# Altium PCB Buck001.PcbDoc
Units mm, origin at the board's own origin, x right, y up, seen from the top; angles counter-clockwise.
Board outline 35 x 25 mm, 2 copper layers (Top Layer, Bottom Layer), stack 1.57 mm thick; 68 components, 12 nets, 95 pads, 277 vias.
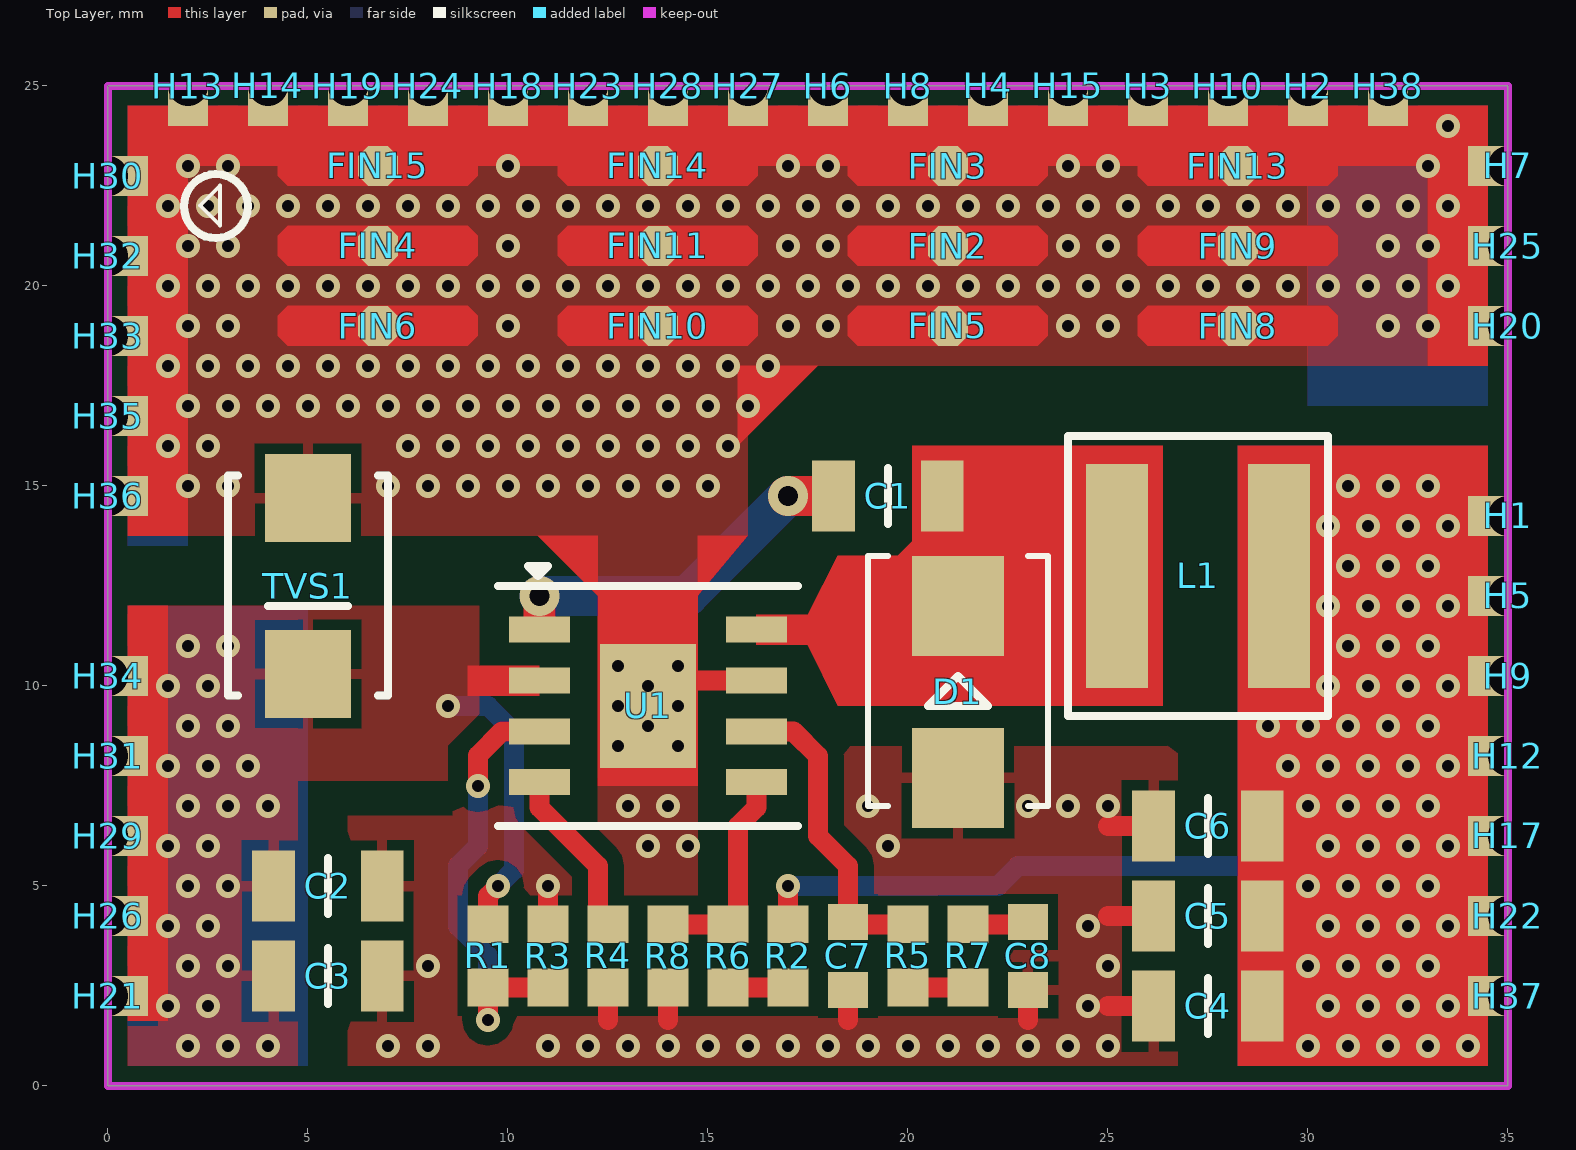
[diagram p0: Top Layer view]
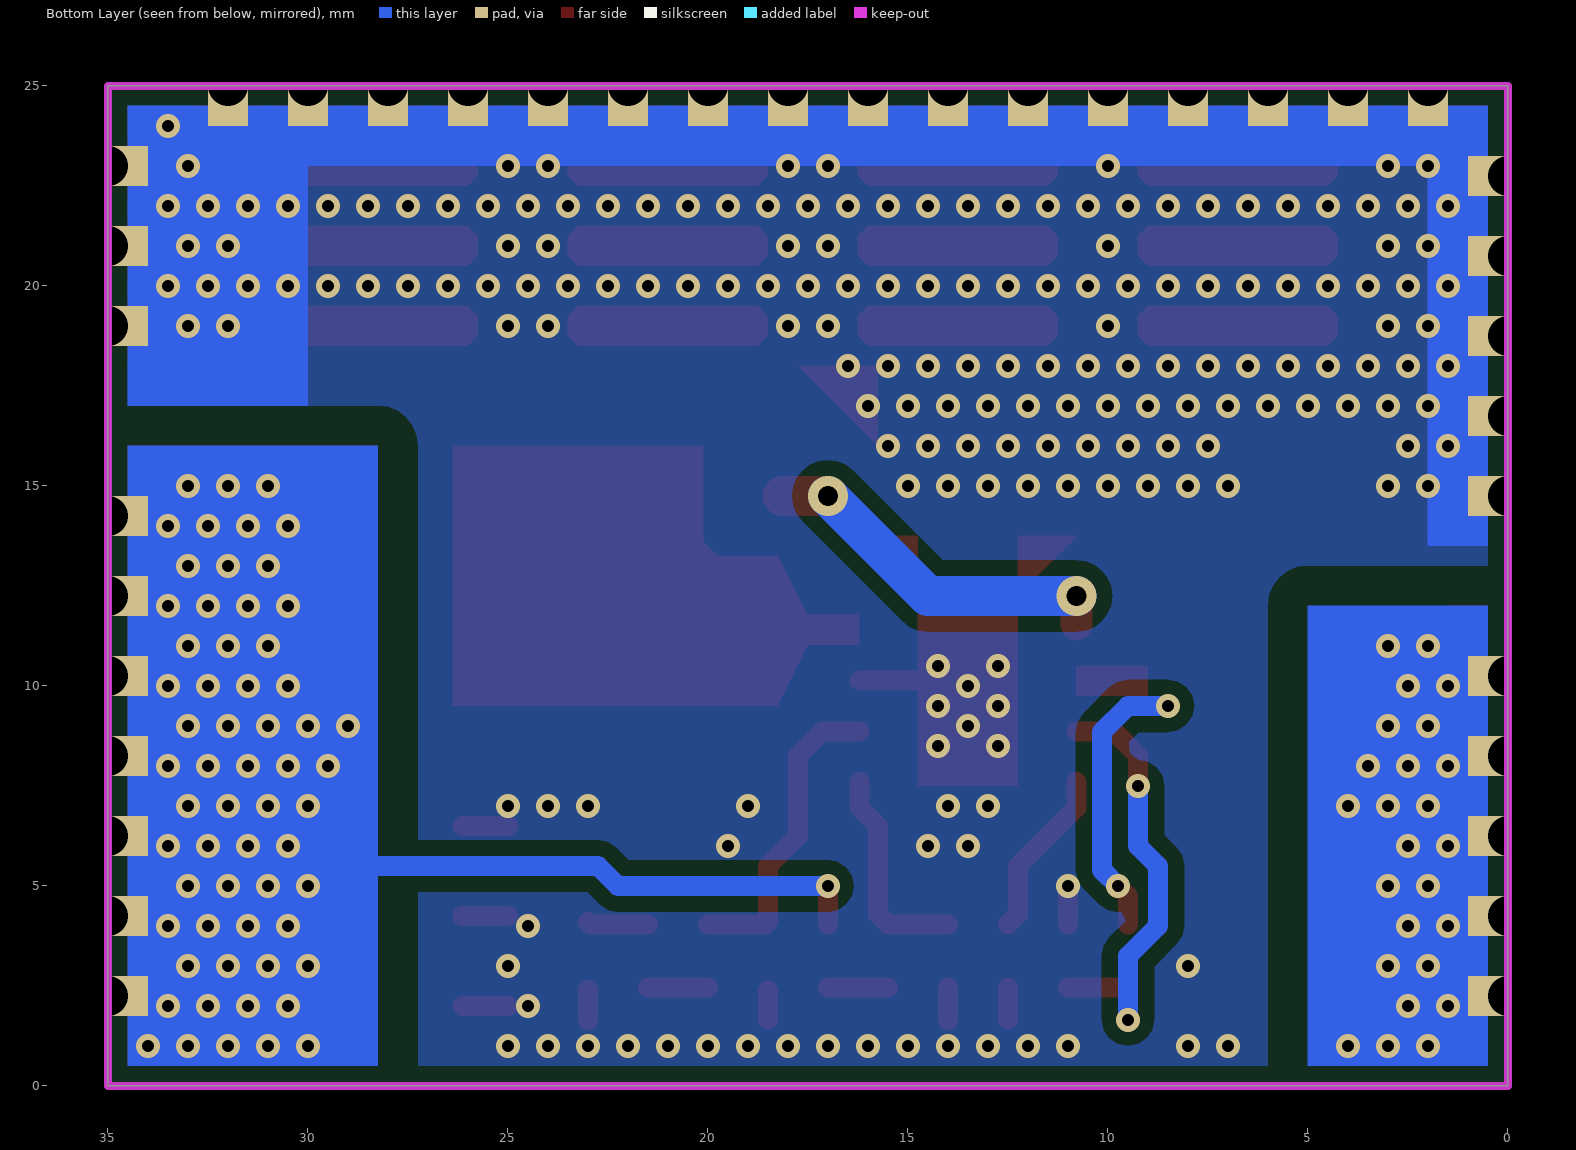
[diagram p1: Bottom Layer view, seen from below]

## Layer stack, top to bottom
Top Solder: solder mask 0.01, Solder Resist, Dk 3.5
Top Layer: signal copper 0.035
Dielectric 1: dielectric 1.5, FR-4, Dk 4.8
Bottom Layer: signal copper 0.035
Bottom Solder: solder mask 0.01, Solder Resist, Dk 3.5

## Board outline
0,0 35,0 35,25 0,25

## Design rules (kind name [scope] priority, off if disabled: settings)
Clearance [All] p1: gap=0.254 ignorepadtopadclearanceinfootprint=TRUE except(0.39: Track-Poly; 0.7: Poly-Poly; 1: Poly-Region)
PolygonConnect [All] p1: connectstyle=Relief reliefconductorwidth=0.254 reliefentries=4 polygonreliefangle="90 Angle" airgapwidth=0.254
RoutingVias [All] p1: holewidth=0.711 width=1.27 viastyle="Through Hole" minholewidth=0.711 minwidth=1.27 maxholewidth=0.711 maxwidth=1.27
SolderMaskExpansion [All] p1: expansion=0.102 istentingtop=FALSE
SupplyNets "Schematic Supply Nets_3" [InNet('VOUT')] p1: voltage=0.000
SupplyNets "Schematic Supply Nets_1" [InNet('GND')] p2: voltage=0.000
SupplyNets "Schematic Supply Nets" [InNet('VIN')] p3: voltage=0.000
Width [All] p1: maxlimit=5 minlimit=0.254 preferedwidth=0.254
30 further rules are at their usual default settings.

## Components (designator, comment, footprint, x,y, rotation, side; value= is the part's Value field where it differs from the comment)
C1 "MLCC_1206" CAP1206 19.5,14.75 r0 top value=100nF
C2 "MLCC_1206" CAP1206 5.5,5 r0 top value=4.7uF
C3 "MLCC_1206" CAP1206 5.5,2.75 r0 top value=4.7uF
C4 "MLCC_1206" CAP1206 27.5,2 r180 top value=47uF
C5 "MLCC_1206" CAP1206 27.5,4.25 r180 top value=47uF
C6 "MLCC_1206" CAP1206 27.5,6.5 r180 top value=47uF
C7 "ERP_102-1" CAPC1608X10N 18.5,3.25 r270 top value=15pF
C8 "ERP_102-1" CAPC1608X10N 23,3.25 r270 top value=0.015uF
D1 "CDBB_5XX_HF" SMB(DO214AA) 21.25,12 r270 top
FIN2 "FIN_5X1" FIN_5X1 21,21 r180 top
FIN3 "FIN_5X1" FIN_5X1 21,23 r180 top
FIN4 "FIN_5X1" FIN_5X1 6.75,21 r180 top
FIN5 "FIN_5X1" FIN_5X1 21,19 r180 top
FIN6 "FIN_5X1" FIN_5X1 6.75,19 r180 top
FIN8 "FIN_5X1" FIN_5X1 28.25,19 r180 top
FIN9 "FIN_5X1" FIN_5X1 28.25,21 r180 top
FIN10 "FIN_5X1" FIN_5X1 13.75,19 r180 top
FIN11 "FIN_5X1" FIN_5X1 13.75,21 r180 top
FIN13 "FIN_5X1" FIN_5X1 28.25,23 r180 top
FIN14 "FIN_5X1" FIN_5X1 13.75,23 r180 top
FIN15 "FIN_5X1" FIN_5X1 6.75,23 r180 top
H1 "Castalated_Hole_1MM" CS_1MM 35,14.25 r90 top
H2 "Castalated_Hole_1MM" CS_1MM 30,25 r180 top
H3 "Castalated_Hole_1MM" CS_1MM 26,25 r180 top
H4 "Castalated_Hole_1MM" CS_1MM 22,25 r180 top
H5 "Castalated_Hole_1MM" CS_1MM 35,12.25 r90 top
H6 "Castalated_Hole_1MM" CS_1MM 18,25 r180 top
H7 "Castalated_Hole_1MM" CS_1MM 35,23 r90 top
H8 "Castalated_Hole_1MM" CS_1MM 20,25 r180 top
H9 "Castalated_Hole_1MM" CS_1MM 35,10.25 r90 top
H10 "Castalated_Hole_1MM" CS_1MM 28,25 r180 top
H12 "Castalated_Hole_1MM" CS_1MM 35,8.25 r90 top
H13 "Castalated_Hole_1MM" CS_1MM 2,25 r180 top
H14 "Castalated_Hole_1MM" CS_1MM 4,25 r180 top
H15 "Castalated_Hole_1MM" CS_1MM 24,25 r180 top
H17 "Castalated_Hole_1MM" CS_1MM 35,6.25 r90 top
H18 "Castalated_Hole_1MM" CS_1MM 10,25 r180 top
H19 "Castalated_Hole_1MM" CS_1MM 6,25 r180 top
H20 "Castalated_Hole_1MM" CS_1MM 35,19 r90 top
H21 "Castalated_Hole_1MM" CS_1MM 0,2.25 r270 top
H22 "Castalated_Hole_1MM" CS_1MM 35,4.25 r90 top
H23 "Castalated_Hole_1MM" CS_1MM 12,25 r180 top
H24 "Castalated_Hole_1MM" CS_1MM 8,25 r180 top
H25 "Castalated_Hole_1MM" CS_1MM 35,21 r90 top
H26 "Castalated_Hole_1MM" CS_1MM 0,4.25 r270 top
H27 "Castalated_Hole_1MM" CS_1MM 16,25 r180 top
H28 "Castalated_Hole_1MM" CS_1MM 14,25 r180 top
H29 "Castalated_Hole_1MM" CS_1MM 0,6.25 r270 top
H30 "Castalated_Hole_1MM" CS_1MM 0,22.75 r270 top
H31 "Castalated_Hole_1MM" CS_1MM 0,8.25 r270 top
H32 "Castalated_Hole_1MM" CS_1MM 0,20.75 r270 top
H33 "Castalated_Hole_1MM" CS_1MM 0,18.75 r270 top
H34 "Castalated_Hole_1MM" CS_1MM 0,10.25 r270 top
H35 "Castalated_Hole_1MM" CS_1MM 0,16.75 r270 top
H36 "Castalated_Hole_1MM" CS_1MM 0,14.75 r270 top
H37 "Castalated_Hole_1MM" CS_1MM 35,2.25 r90 top
H38 "Castalated_Hole_1MM" CS_1MM 32,25 r180 top
L1 "SRP6060FA" SRP6060FA 27.25,12.75 r0 top value=22uH
R1 "ERP_101-1" RES_0603 9.5,3.25 r90 top value=470k
R2 "ERP_101-1" RES_0603 17,3.25 r90 top value=110k
R3 "ERP_101-1" RES_0603 11,3.25 r270 top value=39k
R4 "ERP_101-1" RES_0603 12.5,3.25 r90 top value=120k
R5 "ERP_101-1" RES_0603 20,3.25 r90 top value=24k
R6 "ERP_101-1" RES_0603 15.5,3.25 r270 top value=30k
R7 "ERP_101-1" RES_0603 21.5,3.25 r270 top value=2k4
R8 "ERP_101-1" RES_0603 14,3.25 r90 top value=10k
TVS1 "SMBJ58A" SMBJ58A 5,12.5 r90 top
U1 "TPS54360DDAR" TPS54360DDAR 13.5,9.5 r0 top locked

## Footprints (in the part's own frame and the unit in brackets; to place one, negate y for a bottom-side part, rotate by r counter-clockwise, add the part's x,y. Pads: shape width x height; smd on the part's side, far side on the other; paste and mask are expansions set on the pad)
CAP1206 [mm] "MLCC 1206 (3216 Metric)"
  rect 1.07x1.78 smd: 1(-1.36,0) 2(1.36,0)
  silkscreen extent 0,-0.7 0,0.7, body extent -1.6,-0.8 1.6,0.8, height 1.8
CAPC1608X10N [mm] "Chip Capacitor, 2-Leads, Body 1.60x0.80mm, IPC Medium Density"
  rect 0.9x1 smd: 1(-0.85,0) 2(0.85,0)
  body extent -0.9,-0.5 0.9,0.5, height 1
CS_1MM [mm]
  rect 1x1 hole 1 copper offset 0,0.5 mask+0.01: 1(0,0)
FIN_5X1 [mm]
  oct 1x1 smd: 1(0,0)
  Top Layer region: -2.25,-0.5 -2.5,-0.25 -2.5,0.25 -2.25,0.5 2.25,0.5 2.5,0.25 2.5,-0.25 2.25,-0.5
  body extent -2.5,-0.5 2.5,0.5, height 0.25
RES_0603 [mm]
  rect 0.94x1.02 smd: 1(-0.79,0) 2(0.79,0)
  body extent -0.8,-0.4 0.8,0.4, height 0.45
SMB(DO214AA) [mm]
  rect 2.5x2.3 smd paste+0 mask+0: 1(0,0) 2(4.3,0)
  silkscreen extent -1.25,-2.25 5,2.25, body extent -0.86,-1.99 4.72,1.99, height 3.25
SMBJ58A [mm] "TVS DIODE DO-214AA, SMB"
  rect 2.2x2.15 smd: 1(-2.2,0) 2(2.2,0)
  silkscreen extent -2.74,-2 2.76,2, body extent -2.7,-1.81 2.7,1.81, height 2.44
SRP6060FA [mm]
  rect 1.55x5.6 smd: 1(-2.025,0) 2(2.025,0)
  silkscreen extent -3.25,-3.5 3.25,3.5, body extent -3.2,-3.3 3.2,3.3, height 5.86
TPS54360DDAR [mm]
  rect 1.525x0.65 smd: 1(-2.712,1.905) 2(-2.712,0.635) 3(-2.712,-0.635) 4(-2.712,-1.905) 5(2.712,-1.905) 6(2.712,-0.635) 7(2.712,0.635) 8(2.712,1.905)
  rect 2.4x3.1 smd: 9(0,0)
  silkscreen extent -3.75,-3 3.75,3.5, body extent -3,-2.45 3,2.45, height 1.7

## Part data
C1: "MLCC 1206 (3216 Metric)", Package=1206, Voltage=25V
C2 C3: "MLCC 1206 (3216 Metric)", Manufacturer 1="Murata Electronics", Manufacturer Part Number 1=GRM31CZ72A475KE11L, Package=1206, Voltage=100V
C4 C5 C6: "MLCC 1206 (3216 Metric)", Manufacturer 1="Murata Electronics", Manufacturer Part Number 1=GRM31CZ72A475KE11L, Package=1206, Voltage=25V
C7 C8: library part MLCC_0603, "Chip Capacitor, 2-Leads, Body 1.60x0.80mm, IPC Medium Density", Package=0603
D1: "SMB(DO-214AA) DIODE HF 5A", Manufacturer 1=Comchip, Manufacturer Part Number 1=CDBB5100-HF, Package=SMB
FIN2 FIN3 FIN4 FIN5 FIN6 FIN8 FIN9 FIN10 FIN11 FIN13 FIN14 FIN15: "FIN_5X1 Radiator"
L1: "SRP6060FA Bourns 6.4 x 6.6 MM", Manufacturer 1=Coilcraft, Manufacturer Part Number 1=SRP6060FA-220M, DCR=55mOhm, ISAT=5.6A
R1 R2 R3 R4 R5 R6 R7 R8: library part RES_0603, "RES_0603", Package=0603
TVS1: "TVS DIODE DO-214AA, SMB", Manufacturer Part Number 1=SMBJ64A, PD=600W, VBR=77.1V, VCL=103V, VRV=64V
U1: "Buck, Split Rail Switching Regulator IC Positive Adjustable 0.8V 1 Output 3.5A 8-PowerSOIC (0.154\", 3.90mm Width)", Manufacturer 1="Texas Instruments", Manufacturer Part Number 1=TPS54360DDAR

## Via types
v1: diameter 0.6, hole 0.3, Top Layer to Bottom Layer, tented both sides, 275 vias
v2: diameter 1, hole 0.5, Top Layer to Bottom Layer, tented both sides, 2 vias

## Nets (pads, with @x,y where several pads share a name; then routed paths per layer and width w, separated by ;. In a path a pad name is that pad's centre, name@x,y a point inside that pad or via, vN(x,y) a via of type N, cw(c..) or ccw(c..) an arc to the next point about the centre after c; other vN are vias at no path point)
FB: R6.1 R8.2 U1.5 | length 5.3
  Top Layer w0.5: R8.2 R6.1 15.75,4.29 15.75,6.5 16.212,6.962 U1.5
GND: C2.2 C3.2 C4.2 C5.2 C6.2 C7.2 C8.2 D1.2 FIN2.1 FIN3.1 FIN4.1 FIN5.1 FIN6.1 FIN8.1 FIN9.1 FIN10.1 FIN11.1 FIN13.1 FIN14.1 FIN15.1 H2.1 H3.1 H4.1 H6.1 H7.1 H8.1 H10.1 H13.1 H14.1 H15.1 H18.1 H19.1 H20.1 H23.1 H24.1 H25.1 H27.1 H28.1 H30.1 H32.1 H33.1 H35.1 H36.1 H38.1 R3.1 R4.1 R8.1 TVS1.2 U1.7 U1.9 | length 10.5
  Top Layer w0.5: R3.1 v1(11,5) ; 12.5,1.654 R4.1 ; U1.9 14.135,10.135 U1.7 ; 14,1.654 R8.1 ; 18.5,1.654 C7.2 ; 23,1.654 C8.2 ; 25,2 C4.2 ; 25,4.25 C5.2 ; 25,6.5 C6.2
  other v1: 7,1 8,1 11,1 12,1 13,1 14,1 15,1 16,1 17,1 18,1 19,1 20,1 21,1 22,1 23,1 24,1 25,1 24.5,2 8,3 25,3 24.5,4 13.5,6 14.5,6 19.5,6 13,7 14,7 19,7 23,7 24,7 25,7 12.75,8.5 14.25,8.5 13.5,9 12.75,9.5 14.25,9.5 13.5,10 12.75,10.5 14.25,10.5 2,15 3,15 7,15 8,15 9,15 10,15 11,15 12,15 13,15 14,15 15,15 1.5,16 2.5,16 7.5,16 8.5,16 9.5,16 10.5,16 11.5,16 12.5,16 13.5,16 14.5,16 15.5,16 2,17 3,17 4,17 5,17 6,17 7,17 8,17 9,17 10,17 11,17 12,17 13,17 14,17 15,17 16,17 1.5,18 2.5,18 3.5,18 4.5,18 5.5,18 6.5,18 7.5,18 8.5,18 9.5,18 10.5,18 11.5,18 12.5,18 13.5,18 14.5,18 15.5,18 16.5,18 2,19 3,19 10,19 17,19 18,19 24,19 25,19 32,19 33,19 1.5,20 2.5,20 3.5,20 4.5,20 5.5,20 6.5,20 7.5,20 8.5,20 9.5,20 10.5,20 11.5,20 12.5,20 13.5,20 14.5,20 15.5,20 16.5,20 17.5,20 18.5,20 19.5,20 20.5,20 21.5,20 22.5,20 23.5,20 24.5,20 25.5,20 26.5,20 27.5,20 28.5,20 29.5,20 30.5,20 31.5,20 32.5,20 33.5,20 2,21 3,21 10,21 17,21 18,21 24,21 25,21 32,21 33,21 1.5,22 2.5,22 3.5,22 4.5,22 5.5,22 6.5,22 7.5,22 8.5,22 9.5,22 10.5,22 11.5,22 12.5,22 13.5,22 14.5,22 15.5,22 16.5,22 17.5,22 18.5,22 19.5,22 20.5,22 21.5,22 22.5,22 23.5,22 24.5,22 25.5,22 26.5,22 27.5,22 28.5,22 29.5,22 30.5,22 31.5,22 32.5,22 33.5,22 2,23 3,23 10,23 17,23 18,23 24,23 25,23 33,23 33.5,24
NetC1_1: C1.1 U1.1 | length 9.1
  Top Layer w0.5: v2@10.75,12.25 v2@10.788,12.212
  Top Layer w0.8: U1.1@10.788,11.538 v2@10.788,12.212
  Top Layer w1: v2(17,14.75) C1.1
  Bottom Layer w1: v2(10.788,12.25) 14.5,12.25 v2(17,14.75)
NetC1_2: C1.2 D1.1 L1.1 U1.8
NetC7_1: C7.1 R5.2 U1.6 | length 7.8
  Top Layer w0.5: U1.6 17.135,8.865 17.75,8.25 17.75,6.25 18.5,5.5 C7.1 18.56,4.04 R5.2
NetC8_1: C8.1 R7.1 | length 1.5
  Top Layer w0.5: R7.1 22.94,4.04 C8.1
NetR1_1: R1.1 R3.2 U1.3 | length 11.2
  Top Layer w0.5: v1(9.25,7.5) 9.25,8.262 9.853,8.865 U1.3 ; v1(9.5,1.654) R1.1 R3.2
  Bottom Layer w0.5: v1(9.25,7.5) 9.25,6 8.75,5.5 8.75,4 9.5,3.25 v1(9.5,1.654)
NetR2_1: R2.1 R6.2 | length 1.5
  Top Layer w0.5: R6.2 R2.1
NetR4_2: R4.2 U1.4 | length 4.3
  Top Layer w0.5: U1.4 10.788,6.962 12.25,5.5 12.25,4.29 R4.2
NetR5_1: R5.1 R7.2 | length 1.5
  Top Layer w0.5: R5.1 R7.2
VIN: C2.1 C3.1 H21.1 H26.1 H29.1 H31.1 H34.1 R1.2 TVS1.1 U1.2 | length 7
  Top Layer w0.5: R1.2 9.5,4.75 v1(9.75,5)
  Bottom Layer w0.5: v1(8.5,9.5) 9.5,9.5 10.153,8.847 10.153,6.903 10.153,5.403 v1(9.75,5)
  other v1: 2,1 3,1 4,1 1.5,2 2.5,2 2,3 3,3 1.5,4 2.5,4 2,5 3,5 1.5,6 2.5,6 2,7 3,7 4,7 1.5,8 2.5,8 3.5,8 2,9 3,9 1.5,10 2.5,10 2,11 3,11
VOUT: C4.1 C5.1 C6.1 H1.1 H5.1 H9.1 H12.1 H17.1 H22.1 H37.1 L1.2 R2.2 | length 13.7
  Top Layer w0.5: R2.2 v1(17,5)
  Bottom Layer w0.5: v1(17,5) 22.25,5 22.75,5.5 29.527,5.5
  other v1: 30,1 31,1 32,1 33,1 34,1 30.5,2 31.5,2 32.5,2 33.5,2 30,3 31,3 32,3 33,3 30.5,4 31.5,4 32.5,4 33.5,4 30,5 31,5 32,5 33,5 30.5,6 31.5,6 32.5,6 33.5,6 30,7 31,7 32,7 33,7 29.5,8 30.5,8 31.5,8 32.5,8 33.5,8 29,9 30,9 31,9 32,9 33,9 30.5,10 31.5,10 32.5,10 33.5,10 31,11 32,11 33,11 30.5,12 31.5,12 32.5,12 33.5,12 31,13 32,13 33,13 30.5,14 31.5,14 32.5,14 33.5,14 31,15 32,15 33,15

## Polygon pours and split planes (outlines as drawn)
GND on Top Layer "Top Layer-GND" (solid, pour order 24): 14.75,18 34.5,18 34.5,25 0,25 0,13.75 12.25,13.75 12.25,12.25 14.75,12.25
VIN on Top Layer "VIN_L-01_P-001" (solid, remove dead copper, pour order 20): 0,0.5 0,12.25 4.75,12.25 4.75,0.5
GND on Top Layer "NONET_L-01_P-001" (solid, remove dead copper, pour order 25): 16,18.25 14.5,18.25 14.5,13.75 16,13.75
GND on Top Layer "GND_L-01_P-001" (solid, remove dead copper, pour order 16): 6,9.25 26.75,9.25 26.75,0.5 6,0.5
VIN on Top Layer "Top Layer-VIN" (solid, remove dead copper, pour order 21): 2.038,7.162 8.038,7.162 8.038,12.25 2.038,12.25
VIN on Top Layer "NONET_L-01_P-001" (solid, remove dead copper, pour order 22): 8.038,12 9.288,12 9.288,9.288 8.5,8.5 8.5,7.623 8.038,7.623
GND on Bottom Layer "GND_L-01_P-001" (solid, remove dead copper, pour order 4): 0,25 34.5,25 34.5,0.5 0,0.5

## Keep-outs
Keep-Out Layer:
  the board outline again, w0.2

## Other copper
Top Layer:
  region net NetC1_2: 19,12.5 21,14.5 21,12.5
  region net NetC1_2: 18.25,9.5 20.5,9.5 20.5,16 20.113,16 20.113,13.25 18.25,13.25
  region net GND: 17.75,18 15.75,16 15.75,18
  region net GND: 14.75,12.25 16,13.75 14.75,13.75
  region net GND: 12.25,12.25 10.75,13.75 12.25,13.75
  region net NetC1_2: 17.5,11.03 18.25,9.5 18.25,13.25 17.5,11.78
  pour cut-out: 11.805,7.727 11.805,6.538 12.25,6.538 12.25,7.727
  pour cut-out: 14.75,7.75 14.75,4.764 15.25,4.764 15.25,7.75
  pour cut-out: 4.75,7.625 8.625,7.625 8.625,6.75 4.75,6.75
  pour cut-out: 35,18 17.75,18 17.75,16 35,16
  region net NetC1_2: 16.212,11.78 17.25,11.78 17.5,11.78 17.5,11.03 17.25,11.03 16.212,11.03
  region net NetC1_2: 20.5,16 26.375,16 26.375,9.5 20.5,9.5
  pour cut-out: 0.533,12 0.533,13.75 11.75,13.75 11.75,12
  region net VOUT: 28.25,0.5 28.25,16 34.5,16 34.5,0.5
  pour cut-out: 32,24.5 31.25,24.5 31.25,23.5 32,23.5
  region net GND: 0.5,24.5 34.5,24.5 34.5,23 0.5,23
  region net GND: 34.5,24.5 34.5,18 33,18 33,24.5
  region net GND: 2,24.5 2,13.75 0.5,13.75 0.5,24.5
  region net VIN: 0.5,1.625 0.5,12 1.5,12 1.5,1.625
  region net VIN: 10.788,10.5 10.788,9.75 9,9.75 9,10.5
  region net GND: 12.25,12.5 12.25,7.5 14.75,7.5 14.75,12.5
Bottom Layer:
  region net VOUT: 28.25,0.5 28.25,16 34.5,16 34.5,0.5
  region net GND: 0.5,13.5 2,13.5 2,24.5 0.5,24.5
  region net GND: 34.5,24.5 34.5,17 30,17 30,24.5
  region net GND: 0.5,24.5 31.5,24.5 31.5,23 0.5,23
  region net VIN: 0.5,0.5 0.5,12 5,12 5,0.5

## Silkscreen, mask and mechanical layers (free items; w line width, h text height)
Top Overlay:
  lines w0.1: 2.308,22.008 2.808,22.508 2.808,21.508 2.308,22.008
  lines w0.2: 3.5,21.994 cw(c2.7,21.994) 3.5,22

## Dimensions
0,0 to -0.254,25.019 on Dimensions
0,24.892 to 35.052,25.273 on Dimensions